# Altium PCB lab2_denikin_buck.PcbDoc
Units mm, origin at the board's own origin, x right, y up, seen from the top; angles counter-clockwise.
Board outline 60 x 30 mm, 2 copper layers (Top Layer, Bottom Layer), stack 1.536 mm thick; 26 components, 18 nets, 90 pads, 648 vias.
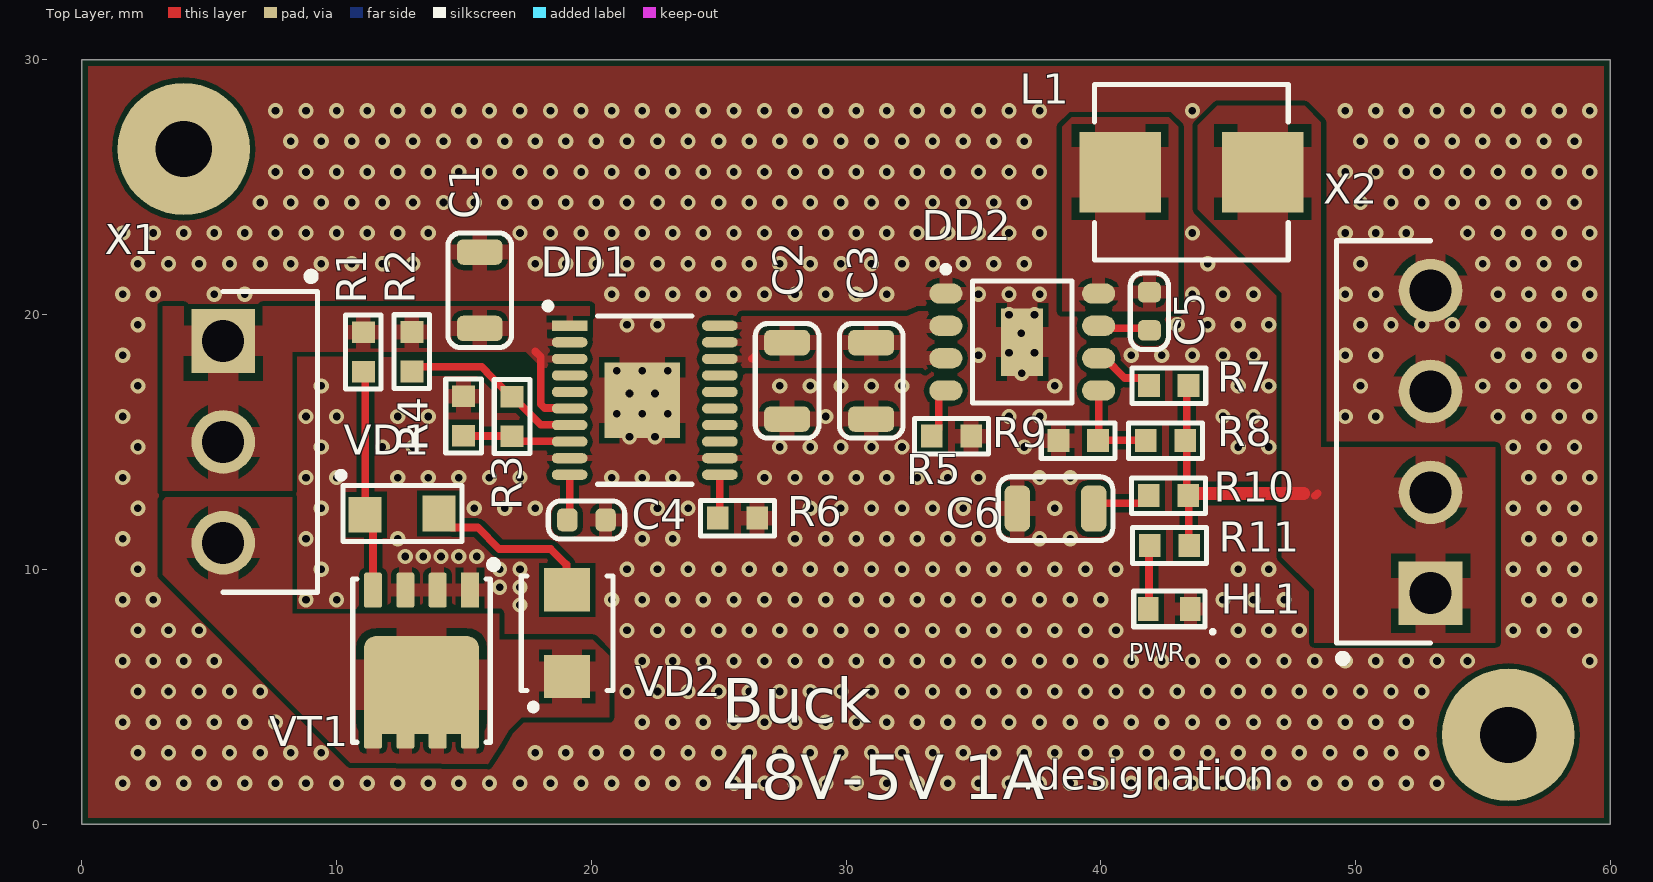
[diagram p0: Top Layer view]
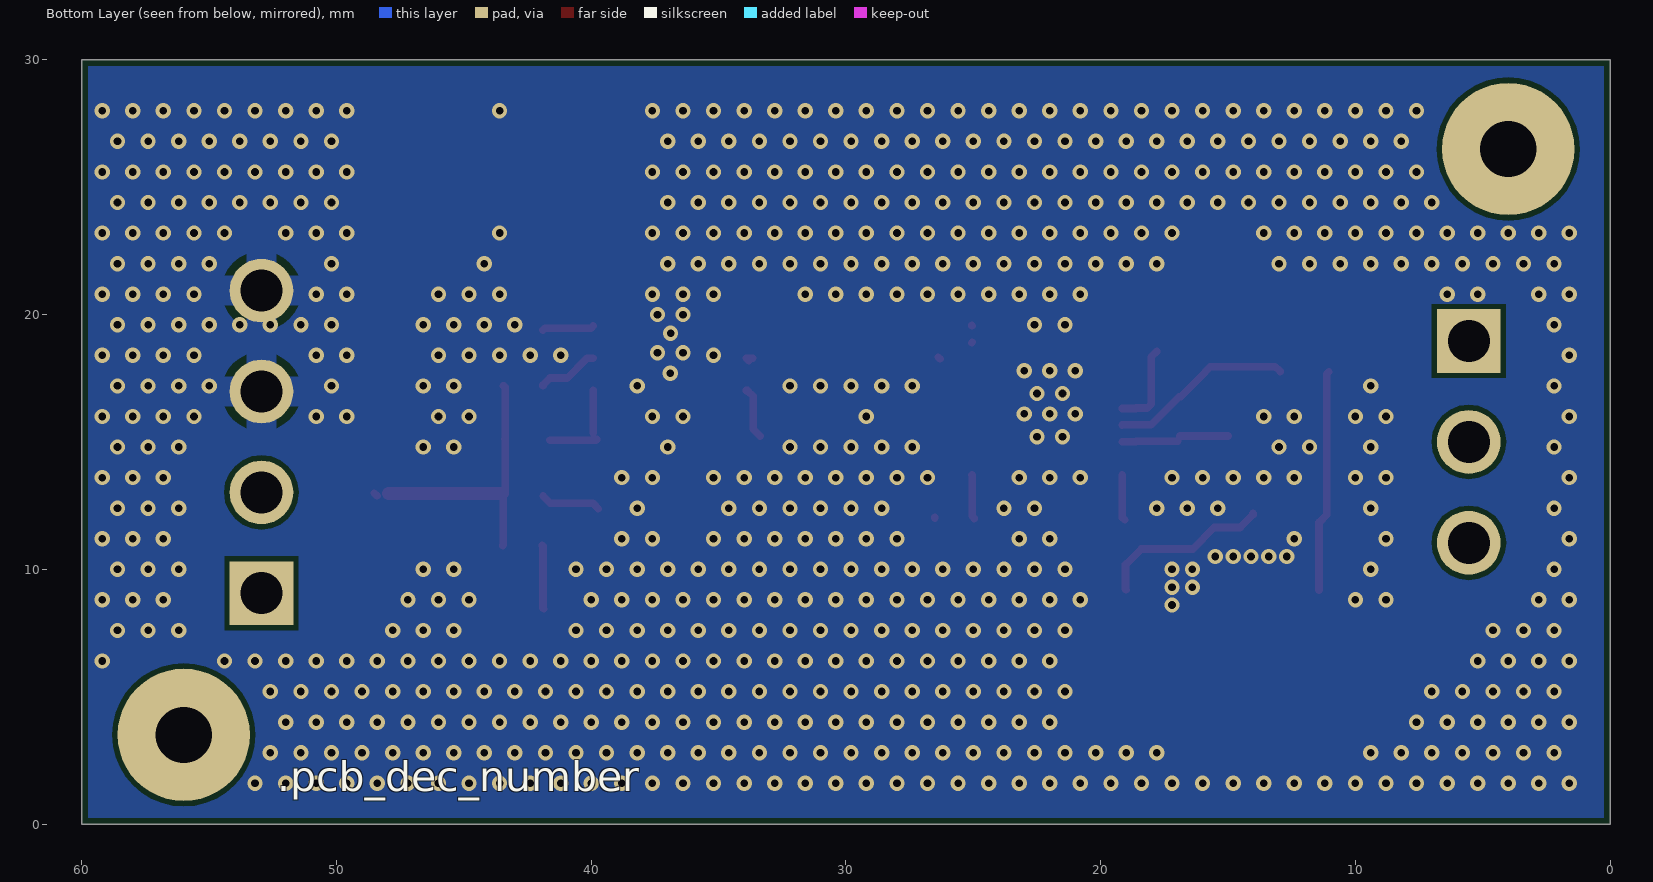
[diagram p1: Bottom Layer view, seen from below]
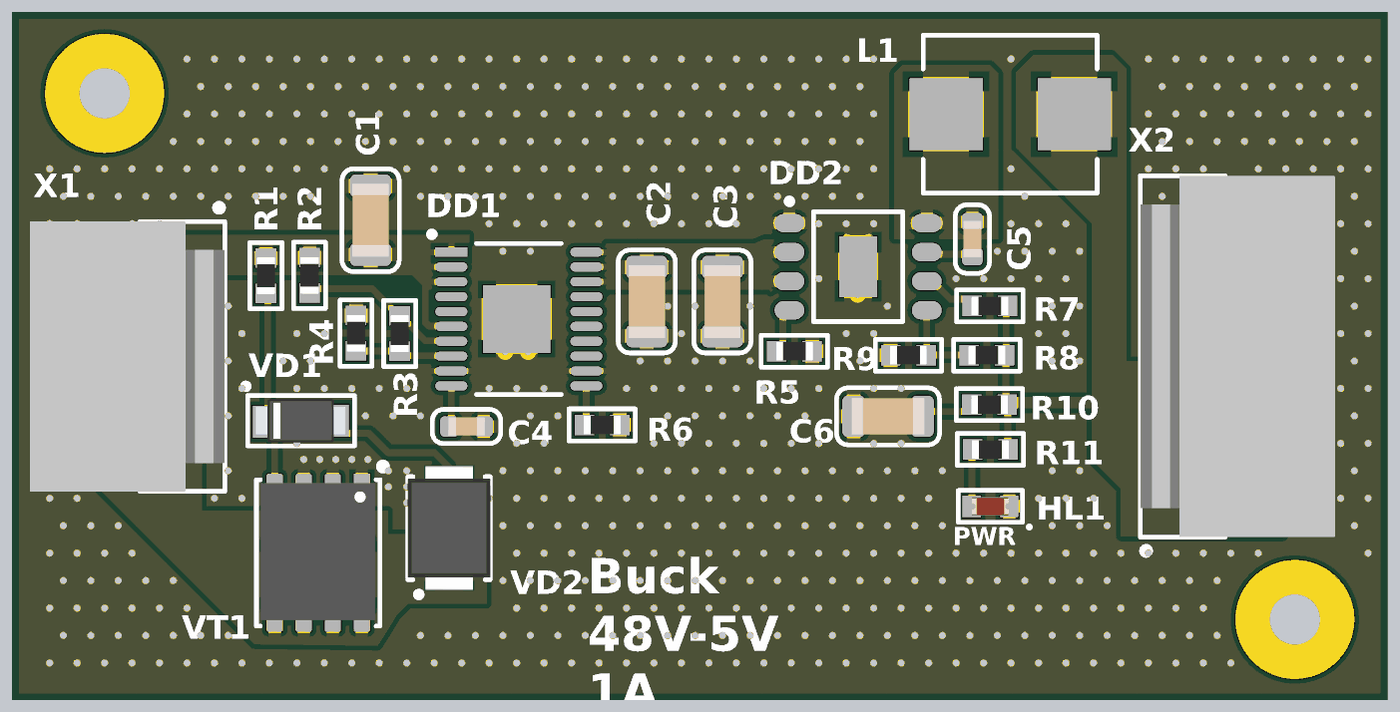
[diagram p2: 3D render of the assembled board from above, using the file's embedded part models]

## Layer stack, top to bottom
Top Solder: solder mask 0.0102, Solder Resist, Dk 3.5
Top Layer: signal copper 0.018
Core 1: core 1.5, FR4, Dk 4.6
Bottom Layer: signal copper 0.018
Bottom Solder: solder mask 0.0102, Solder Resist, Dk 3.5

## Board outline
0,0 60,0 60,30 0,30

## Design rules (kind name [scope] priority, off if disabled: settings)
AcuteAngle min_acute_angle [OnCopper] p1: minimum=3.50000000000000E+0001 checktracksonly=FALSE // Минимальный угол между примитивами топологии
BoardOutlineClearance board_outline_clearance_std [NOT (OnLayer('Bottom Overlay') OR OnLayer('Top Overlay'))] p1: gap=0.25 ignorepadtopadclearanceinfootprint=FALSE except(0: Arc-SplitContinuation Track-SplitContinuation SMDPad-SplitContinuation THPad-SplitContinuation Via-SplitContinuation Fill-SplitContinuation Poly-SplitContinuation Region-SplitContinuation Text-SplitContinuation) // Отступ элементов топологии от края фрезеруемой печатной платы
Clearance clearance_outer_18um_std [OnTopLayer OR OnBottomLayer] p1: gap=0.125 ignorepadtopadclearanceinfootprint=TRUE except(0.2: Arc-Fill Arc-Poly Track-Fill Track-Poly SMDPad-SMDPad SMDPad-Fill SMDPad-Poly THPad-Fill THPad-Poly Via-Fill Via-Poly Fill-Fill Fill-Poly Poly-Poly Poly-Region Poly-Text; 0.25: Arc-Hole Track-Hole SMDPad-Hole THPad-Hole Via-Hole Fill-Hole Poly-Hole Region-Hole Text-Hole) // Зазоры на внешних слоях
Clearance clearance_inner_18um_std [NOT (OnTopLayer Or OnBottomLayer)] p2: gap=0.125 ignorepadtopadclearanceinfootprint=FALSE except(0.2: Arc-Fill Arc-Poly Track-Fill Track-Poly SMDPad-SMDPad SMDPad-Fill SMDPad-Poly THPad-Fill THPad-Poly Via-Fill Via-Poly Fill-Fill Fill-Poly Poly-Poly Poly-Region Poly-Text; 0.25: Arc-Hole Track-Hole SMDPad-Hole THPad-Hole Via-Hole Fill-Hole Poly-Hole Region-Hole Text-Hole) // Зазоры на внутренних слоях
ComponentClearance [All] p1: gap=0 collisioncheckmode=3 verticalgap=0 showdistances=FALSE
DiffPairsRouting diff_pairs_routing [All] p1: maxlimit=0.127 minlimit=0.127 mostfreqgap=0.127 toplayer_minwidth=0.143 toplayer_maxwidth=0.143 toplayer_prefwidth=0.143 bottomlayer_minwidth=0.143 bottomlayer_maxwidth=0.143 bottomlayer_prefwidth=0.143 impedanceprofiledriven=TRUE impedanceprofileid={FD46899E-B5A2-4EF5-A302-5D2DB6A51F35} maxuncoupledlength=12.7 // Правила трассировки дифференциальных пар
HoleSize min_hole_size_std [IsPad] p1: absolutevalues=TRUE maxlimit=5.9 minlimit=0.6 maxpercent=80.000 minpercent=20.000 // Диаметр межслойного переходного отверстия
HoleSize min_hole_size_via_std [IsVia] p2: absolutevalues=TRUE maxlimit=5.9 minlimit=0.3 maxpercent=80.000 minpercent=20.000 // Минимальный диаметр монтажного отверстия
HoleToHoleClearance hole_to_hole_clearance_std [All] p1: gap=0.2 allowstackedmicrovias=FALSE // Минимальное расстояние между краями двух отверстий
MinimumAnnularRing min_via_ar_std [All] p1: minimumring=0.15 // Поясок площадки переходного отверстия (Annular ring VIA)
MinimumAnnularRing min_pad_ar_std [All] p2: minimumring=0.2 // Поясок монтажной контактной площадки (Annular ring PAD)
MinimumSolderMaskSliver min_solder_mask_bridge_std [All] p1: minsoldermaskwidth=0.15 // Мнимальная ширина масочного мостика
PlaneClearance plane_clearance_18um_std [All] p1: clearance=0.2 // Отступ полигона (для слоя plane) от элементов топологии
PlaneConnect [All] p1: planeconnectstyle=Relief reliefexpansion=0.5 reliefentries=4 reliefconductorwidth=0.2 reliefairgap=0.2
PolygonConnect poly_connect_to_pad<=0.3 [(AsMM(PadXSize_AllLayers)<=0.301) or (AsMM(PadYSize_AllLayers)<=0.301)] p1: thpad.connectstyle=Relief thpad.reliefconductorwidth=0.2 thpad.reliefentries=4 thpad.polygonreliefangle="90 Angle" thpad.airgapwidth=0.2 smdpad.connectstyle=Relief smdpad.reliefconductorwidth=0.2 smdpad.reliefentries=4 smdpad.polygonreliefangle="90 Angle" smdpad.airgapwidth=0.2 via.connectstyle=Direct via.reliefconductorwidth=0.254 via.reliefentries=4 via.polygonreliefangle="90 Angle" via.airgapwidth=0.254 // Правила подключения полигонов для падов от 0,3мм и меньше
PolygonConnect poly_connect_to_pad<=0.4 [(AsMM(PadXSize_AllLayers)<=0.401) or (AsMM(PadYSize_AllLayers)<=0.401)] p2: thpad.connectstyle=Relief thpad.reliefconductorwidth=0.26 thpad.reliefentries=4 thpad.polygonreliefangle="90 Angle" thpad.airgapwidth=0.2 smdpad.connectstyle=Relief smdpad.reliefconductorwidth=0.26 smdpad.reliefentries=4 smdpad.polygonreliefangle="90 Angle" smdpad.airgapwidth=0.2 via.connectstyle=Direct via.reliefconductorwidth=0.254 via.reliefentries=4 via.polygonreliefangle="90 Angle" via.airgapwidth=0.254 // Правила подключения полигонов для падов от 0,4 и меньше
PolygonConnect poly_connect_to_pad<=0.6 [(AsMM(PadXSize_AllLayers)<=0.601) or (AsMM(PadYSize_AllLayers)<=0.601)] p3: thpad.connectstyle=Relief thpad.reliefconductorwidth=0.33 thpad.reliefentries=4 thpad.polygonreliefangle="90 Angle" thpad.airgapwidth=0.2 smdpad.connectstyle=Relief smdpad.reliefconductorwidth=0.33 smdpad.reliefentries=4 smdpad.polygonreliefangle="90 Angle" smdpad.airgapwidth=0.2 via.connectstyle=Direct via.reliefconductorwidth=0.254 via.reliefentries=4 via.polygonreliefangle="90 Angle" via.airgapwidth=0.254 // Правила подключения полигонов для падов от 0,6мм и меньше
PolygonConnect poly_connect_to_pad<=0.7 [(AsMM(PadXSize_AllLayers)<=0.701) or (AsMM(PadYSize_AllLayers)<=0.701)] p4: thpad.connectstyle=Relief thpad.reliefconductorwidth=0.46 thpad.reliefentries=4 thpad.polygonreliefangle="90 Angle" thpad.airgapwidth=0.2 smdpad.connectstyle=Relief smdpad.reliefconductorwidth=0.46 smdpad.reliefentries=4 smdpad.polygonreliefangle="90 Angle" smdpad.airgapwidth=0.2 via.connectstyle=Direct via.reliefconductorwidth=0.254 via.reliefentries=4 via.polygonreliefangle="90 Angle" via.airgapwidth=0.254 // Правила подключения полигонов для падов от 0,7мм и меньше
PolygonConnect poly_connect_to_pad<=0.8 [(AsMM(PadXSize_AllLayers)<=0.8)or(AsMM(PadYSize_AllLayers)<=0.8)] p5: thpad.connectstyle=Relief thpad.reliefconductorwidth=0.53 thpad.reliefentries=4 thpad.polygonreliefangle="90 Angle" thpad.airgapwidth=0.3 smdpad.connectstyle=Relief smdpad.reliefconductorwidth=0.53 smdpad.reliefentries=4 smdpad.polygonreliefangle="90 Angle" smdpad.airgapwidth=0.2 via.connectstyle=Direct via.reliefconductorwidth=0.254 via.reliefentries=4 via.polygonreliefangle="90 Angle" via.airgapwidth=0.254 // Правила подключения полигонов для падов от 0,8мм и меньше
PolygonConnect poly_connect_to_pad<=1 [(AsMM(PadXSize_AllLayers)<=1.01)or(AsMM(PadYSize_AllLayers)<=1.01)] p6: thpad.connectstyle=Relief thpad.reliefconductorwidth=0.6 thpad.reliefentries=4 thpad.polygonreliefangle="90 Angle" thpad.airgapwidth=0.3 smdpad.connectstyle=Relief smdpad.reliefconductorwidth=0.6 smdpad.reliefentries=4 smdpad.polygonreliefangle="90 Angle" smdpad.airgapwidth=0.2 via.connectstyle=Direct via.reliefconductorwidth=0.254 via.reliefentries=4 via.polygonreliefangle="90 Angle" via.airgapwidth=0.254 // Правила подключения полигонов для падов от 1мм и меньше
PolygonConnect poly_connect_to_pad<=1.3 [(AsMM(PadXSize_AllLayers)<=1.31)or(AsMM(PadYSize_AllLayers)<=1.31)] p7: thpad.connectstyle=Relief thpad.reliefconductorwidth=0.66 thpad.reliefentries=4 thpad.polygonreliefangle="90 Angle" thpad.airgapwidth=0.3 smdpad.connectstyle=Relief smdpad.reliefconductorwidth=0.86 smdpad.reliefentries=4 smdpad.polygonreliefangle="90 Angle" smdpad.airgapwidth=0.2 via.connectstyle=Direct via.reliefconductorwidth=0.254 via.reliefentries=4 via.polygonreliefangle="90 Angle" via.airgapwidth=0.254 // Правила подключения полигонов для падов от 1,3мм и меньше
PolygonConnect poly_connect_to_pad<=1.6 [(AsMM(PadXSize_AllLayers)<=1.61)or(AsMM(PadYSize_AllLayers)<=1.61)] p8: thpad.connectstyle=Relief thpad.reliefconductorwidth=0.8 thpad.reliefentries=4 thpad.polygonreliefangle="90 Angle" thpad.airgapwidth=0.3 smdpad.connectstyle=Relief smdpad.reliefconductorwidth=1 smdpad.reliefentries=4 smdpad.polygonreliefangle="90 Angle" smdpad.airgapwidth=0.2 via.connectstyle=Direct via.reliefconductorwidth=0.254 via.reliefentries=4 via.polygonreliefangle="90 Angle" via.airgapwidth=0.254 // Правила подключения полигонов для падов от 1,6мм и меньше
PolygonConnect poly_connect_to_pad<=1.8 [(AsMM(PadXSize_AllLayers)<=1.8)or(AsMM(PadYSize_AllLayers)<=1.8)] p9: thpad.connectstyle=Relief thpad.reliefconductorwidth=1 thpad.reliefentries=4 thpad.polygonreliefangle="90 Angle" thpad.airgapwidth=0.3 smdpad.connectstyle=Relief smdpad.reliefconductorwidth=1.2 smdpad.reliefentries=4 smdpad.polygonreliefangle="90 Angle" smdpad.airgapwidth=0.2 via.connectstyle=Direct via.reliefconductorwidth=0.254 via.reliefentries=4 via.polygonreliefangle="90 Angle" via.airgapwidth=0.254 // Правила подключения полигонов для падов от 1,8мм и меньше
PolygonConnect poly_connect_to_pad<=2 [(AsMM(PadXSize_AllLayers)<=2.01)or(AsMM(PadYSize_AllLayers)<=2.01)] p10: thpad.connectstyle=Relief thpad.reliefconductorwidth=1.1 thpad.reliefentries=4 thpad.polygonreliefangle="90 Angle" thpad.airgapwidth=0.3 smdpad.connectstyle=Relief smdpad.reliefconductorwidth=1.4 smdpad.reliefentries=4 smdpad.polygonreliefangle="90 Angle" smdpad.airgapwidth=0.2 via.connectstyle=Direct via.reliefconductorwidth=0.254 via.reliefentries=4 via.polygonreliefangle="90 Angle" via.airgapwidth=0.254 // Правила подключения полигонов для падов от 2мм и меньше
PolygonConnect poly_connect_to_pad<=2.3 [(AsMM(PadXSize_AllLayers)<=2.31)or(AsMM(PadYSize_AllLayers)<=2.31)] p11: thpad.connectstyle=Relief thpad.reliefconductorwidth=1.2 thpad.reliefentries=4 thpad.polygonreliefangle="90 Angle" thpad.airgapwidth=0.3 smdpad.connectstyle=Relief smdpad.reliefconductorwidth=1.4 smdpad.reliefentries=4 smdpad.polygonreliefangle="90 Angle" smdpad.airgapwidth=0.2 via.connectstyle=Direct via.reliefconductorwidth=0.254 via.reliefentries=4 via.polygonreliefangle="90 Angle" via.airgapwidth=0.254 // Правила подключения полигонов для падов от 2,3мм и меньше
PolygonConnect poly_connect_to_pad<=2.5 [(AsMM(PadXSize_AllLayers)<=2.51)or(AsMM(PadYSize_AllLayers)<=2.51)] p12: thpad.connectstyle=Relief thpad.reliefconductorwidth=1.2 thpad.reliefentries=4 thpad.polygonreliefangle="90 Angle" thpad.airgapwidth=0.3 smdpad.connectstyle=Relief smdpad.reliefconductorwidth=1.4 smdpad.reliefentries=4 smdpad.polygonreliefangle="90 Angle" smdpad.airgapwidth=0.2 via.connectstyle=Direct via.reliefconductorwidth=0.254 via.reliefentries=4 via.polygonreliefangle="90 Angle" via.airgapwidth=0.254 // Правила подключения полигонов для падов от 2,5мм и меньше
PolygonConnect poly_connect_to_pad<=2.7 [(AsMM(PadXSize_AllLayers)<=2.71)or(AsMM(PadYSize_AllLayers)<=2.71)] p13: thpad.connectstyle=Relief thpad.reliefconductorwidth=1.4 thpad.reliefentries=4 thpad.polygonreliefangle="90 Angle" thpad.airgapwidth=0.3 smdpad.connectstyle=Relief smdpad.reliefconductorwidth=1.6 smdpad.reliefentries=4 smdpad.polygonreliefangle="90 Angle" smdpad.airgapwidth=0.2 via.connectstyle=Direct via.reliefconductorwidth=0.254 via.reliefentries=4 via.polygonreliefangle="90 Angle" via.airgapwidth=0.254 // Правила подключения полигонов для падов от 2,7мм и меньше
PolygonConnect poly_connect_to_pad<=3 [(AsMM(PadXSize_AllLayers)<=3.01)or(AsMM(PadYSize_AllLayers)<=3.01)] p14: thpad.connectstyle=Relief thpad.reliefconductorwidth=1.6 thpad.reliefentries=4 thpad.polygonreliefangle="90 Angle" thpad.airgapwidth=0.3 smdpad.connectstyle=Relief smdpad.reliefconductorwidth=1.8 smdpad.reliefentries=4 smdpad.polygonreliefangle="90 Angle" smdpad.airgapwidth=0.2 via.connectstyle=Direct via.reliefconductorwidth=0.254 via.reliefentries=4 via.polygonreliefangle="90 Angle" via.airgapwidth=0.254 // Правила подключения полигонов для падов от 3мм и меньше
PolygonConnect poly_connect_to_pad<=7 [(AsMM(PadXSize_AllLayers)<7.01)or(AsMM(PadYSize_AllLayers)<=7.01)] p15: thpad.connectstyle=Relief thpad.reliefconductorwidth=2 thpad.reliefentries=4 thpad.polygonreliefangle="90 Angle" thpad.airgapwidth=0.4 smdpad.connectstyle=Relief smdpad.reliefconductorwidth=2 smdpad.reliefentries=4 smdpad.polygonreliefangle="90 Angle" smdpad.airgapwidth=0.3 via.connectstyle=Direct via.reliefconductorwidth=0.254 via.reliefentries=4 via.polygonreliefangle="90 Angle" via.airgapwidth=0.254 // Правила подключения полигонов для падов от 7мм и меньше
PolygonConnect poly_connect_to_pad [All] p16: thpad.connectstyle=Relief thpad.reliefconductorwidth=0.25 thpad.reliefentries=4 thpad.polygonreliefangle="90 Angle" thpad.airgapwidth=0.2 smdpad.connectstyle=Relief smdpad.reliefconductorwidth=0.25 smdpad.reliefentries=4 smdpad.polygonreliefangle="90 Angle" smdpad.airgapwidth=0.2 via.connectstyle=Direct via.reliefconductorwidth=0.25 via.reliefentries=4 via.polygonreliefangle="90 Angle" via.airgapwidth=0.2 // Правила подключения полигонов общие
RoutingCorners [All] p1 off: cornerstyle=45-Degree minsetback=2.5 maxsetback=2.5
RoutingVias [All] p1: holewidth=0.3 width=0.6 viastyle="Through Hole" minholewidth=0.3 minwidth=0.6 maxholewidth=5.9 maxwidth=6.4
SilkToSilkClearance silk_to_silk_clearance_std [All] p1 off: silktosilkclearance=0.15 // Отступ текста шелкографии от других примитивов шелкографии
SilkToSolderMaskClearance silk_to_solder_mask_clearance_std [IsPad] p1 off: minsilkscreentomaskgap=0.15 clearancetoexposedcopper=FALSE // Минимальное расстояние между элементами шелкографии и вскрытой медью
SolderMaskExpansion solder_mask_expansion_std [All] p1: expansion=0.05 // Припуск паяльной масски
UnRoutedNet [All] p1: checkbadconnections=TRUE
Width width_18um_std [All] p1: maxlimit=10 minlimit=0.125 preferedwidth=0.15 checkconnectedcopper=TRUE // Ширина проводников (общая)
19 further rules are at their usual default settings.

## Classes and differential pairs
component class lab2_demcheva_buck: C1 C2 C3 C4 C5 C6 DD1 DD2 HL1 L1 R1 R2 R3 R4 R7 R8 R9 VD1 VD2 VT1 X1 X2

## Components (designator, comment, footprint, x,y, rotation, side; value= is the part's Value field where it differs from the comment)
C1 "2,2 мк" C1206 15.621,20.955 r270 top
C2 "2,2 мк" C1206 27.686,17.399 r90 top
C3 "2,2 мк" C1206 30.988,17.399 r90 top
C4 "680" C0603 19.812,11.938 r180 top
C5 "2200" C0603 41.91,20.129 r90 top
C6 "10 мк" C1206 38.226,12.382 r0 top
DD1 "TPS16630PWPR" HTSSOP-20 22.098,16.637 r0 top
DD2 "LM5164-Q1" SO-8-POWERPAD 36.918,18.923 r0 top
HL1 "TLMG1100-GS08" HL0603 42.697,8.445 r180 top
L1 "SRP7028A-220M" SRP-2-670X660X280 43.561,25.59 r0 top
R1 "1,2 к" R0603 11.049,18.529 r270 top
R2 "820 к" R0603 12.954,18.542 r270 top
R3 "4,99 к" R0603 16.891,16.002 r270 top
R4 "20,5 к" R0603 14.986,16.015 r270 top
R5 "24 к" R0603 34.138,15.227 r0 top
R6 "18 к" R0603 25.736,12.007 r0 top
R7 "10 к" R0603 42.672,17.208 r180 top
R8 "560 к" R0603 42.545,15.049 r180 top
R9 "180 к" R0603 39.116,15.049 r180 top
R10 "1" R0603 42.66,12.89 r180 top
R11 "100" R0603 42.697,10.934 r180 top
VD1 "BZD17C18P" DO-219AB 12.573,12.192 r0 top
VD2 "SS36-E3/57T" DO-214AB 19.05,7.493 r90 top
VT1 "CSD19532Q5B" SON-8 13.335,6.411 r180 top
X1 "1-1123723-3" 1-1123723-3 5,15 r270 top
X2 "1-1123723-4" 1-1123723-4 53.5,15 r90 top

## Footprints (in the part's own frame and the unit in brackets; to place one, negate y for a bottom-side part, rotate by r counter-clockwise, add the part's x,y. Pads: shape width x height; smd on the part's side, far side on the other; paste and mask are expansions set on the pad)
1-1123723-3 [mm]
  rect 2.5x2.5 hole 1.65: 1(-3.96,0.55)
  round 2.5 hole 1.65: 2(0,0.55) 3(3.96,0.55)
  silkscreen extent -6.65,0.55 5.9,4.25, body extent -5.91,-4.25 5.91,4.25, height 10.7
1-1123723-4 [mm]
  rect 2.5x2.5 hole 1.65: 1(-5.94,0.55)
  round 2.5 hole 1.65: 2(-1.98,0.55) 3(1.98,0.55) 4(5.94,0.55)
  silkscreen extent -8.65,0.55 7.9,4.25, body extent -7.89,-4.25 7.89,4.25, height 10.7
C0603 [mm] "Chip Capacitor, 2-Leads, Body 1,60x0,80mm, IPC Medium Density"
  rrect50% 0.8x0.9 smd: 1(-0.75,0) 2(0.75,0)
  silkscreen extent -1.5,-0.75 1.5,0.75, body extent -0.8,-0.4 0.8,0.4, height 0.8
C1206 [mm] "Chip Capacitor, 2-Leads, Body 3,20x1,60mm, IPC Medium Density"
  rrect50% 1x1.8 smd: 1(-1.5,0) 2(1.5,0)
  silkscreen extent -2.25,-1.25 2.25,1.25, body extent -1.6,-0.8 1.6,0.8, height 0.78
DO-214AB [mm] "Molded Diode, 2-Leads, Body 6,86x5,91mm, IPC Medium Density"
  rect 1.7x1.8 smd: 1(-1.7,0) 2(1.7,0)
  silkscreen extent -3.02,-1.8 2.25,1.8, body extent -2.7,-1.81 2.7,1.81, height 2.43
DO-219AB [mm]
  rect 1.3x1.4 smd: 1(-1.45,-0.05) 2(1.45,0)
  silkscreen extent -2.45,-1.1 2.35,1.55, body extent -1.95,-0.95 1.95,0.95, height 1.25
HL0603 [mm] "Chip Diode, 2-Leads, Body 1,60x0,80mm, IPC Medium Density"
  rect 0.8x0.95 smd: 1(-0.825,0) 2(0.825,0)
  silkscreen extent -1.75,-0.7 1.4,0.95, body extent -0.81,-0.4 0.81,0.4, height 0.6
HTSSOP-20 [mm] "TSOP, 20-Leads, Body 6,50x4,40mm, Pitch 0,65mm, Thermal Pad 2,96x2,96mm, IPC Medium Density"
  rect 2.96x2.96 smd: 0(-0.098,0)
  rect 1.4x0.4 smd: 1(-2.95,2.925)
  oval 1.4x0.4 smd: 2(-2.95,2.275) 3(-2.95,1.625) 4(-2.95,0.975) 5(-2.95,0.325) 6(-2.95,-0.325) 7(-2.95,-0.975) 8(-2.95,-1.625) 9(-2.95,-2.275) 10(-2.95,-2.925) 11(2.95,-2.925) 12(2.95,-2.275) 13(2.95,-1.625) 14(2.95,-0.975) 15(2.95,-0.325) 16(2.95,0.325) 17(2.95,0.975) 18(2.95,1.625) 19(2.95,2.275) 20(2.95,2.925)
  silkscreen extent -3.92,-3.3 1.85,3.82, body extent -2.25,-3.3 2.25,3.3, height 1.2
R0603 [mm] "Chip Resistor, 2-Leads, Body 1,60x0,80mm, IPC Medium Density"
  rect 0.85x0.9 smd: 1(-0.775,0) 2(0.775,0)
  silkscreen extent -1.45,-0.7 1.45,0.7, body extent -0.8,-0.4 0.8,0.4, height 0.45
SO-8-POWERPAD [mm] "SOP, 8-Leads, Body 4,90x3,90mm, Pitch 1,27mm, Thermal Pad 2,65x1,65mm, IPC Medium Density"
  rect 1.65x2.65 smd: 0(0,0)
  oval 1.3x0.8 smd: 1(-3,1.905) 2(-3,0.635) 3(-3,-0.635) 4(-3,-1.905) 5(3,-1.905) 6(3,-0.635) 7(3,0.635) 8(3,1.905)
  silkscreen extent -3.12,-2.4 1.95,2.98, body extent -1.9,-2.4 1.9,2.4, height 1.7
SON-8 [mm]
  rrect25% 0.71x1.372 smd paste-10: D(-1.905,2.77) D(-0.635,2.77) D(0.635,2.77) D(1.905,2.77)
  rrect25% 4.52x3.85 smd paste-10: D(0,0.95)
  rrect25% 0.71x1.372 smd paste-0.002: G(1.905,-2.77) S(-0.635,-2.77) S(0.635,-2.77)
  rect 0.71x1.372 smd paste-0.002: S(-1.905,-2.77)
  silkscreen extent -2.83,-3.78 2.7,3.2, body extent -2.48,-3.05 2.52,2.95, height 1.05
SRP-2-670X660X280 [mm] "Precision Wire Wound Inductor, 2-Leads, Body 7,30x6,60mm, IPC Medium Density"
  rect 3.2x3.15 smd: 1(-2.8,0) 2(2.8,0)
  silkscreen extent -3.8,-3.45 3.8,3.45, body extent -3.8,-3.45 3.8,3.45, height 3

## Part data
C1: library part c0077, "=Описание", HelpURL=https://www.yageo.com/upload/media/product/productsearch/datasheet/mlcc/UPY-NP0X7R_MV_100-to-630V_22.pdf, ID=c0077, Корпус=1206, Наименование=CC1206KKX7R0BB225, Напряжение="100 В", Номинал="2,2 мк", Номинальное напряжение="100 В", Описание="Конденсатор чип 1206 2,2 мкФ 100 В ±10 %", Отклонение="±10 %", Производитель="YAGEO Corp.", Рабочие температуры="от –55 °С до +125 °С", Температурный коэффициент емкости=X7R, Фамилия=Ларионов
C2 C3: library part c0076, "=Описание", HelpURL=https://www.yageo.com/upload/media/product/productsearch/datasheet/mlcc/UPY-NP0X7R_MV_100-to-630V_22.pdf, ID=c0076, Корпус=1206, Наименование=CC1206KKX7R0BB225, Напряжение="100 В", Номинал="2,2 мк", Номинальное напряжение="100 В", Описание="Конденсатор чип 1206 2,2 мкФ 100 В ±10 %", Отклонение="±10 %", Производитель="YAGEO Corp.", Рабочие температуры="от –55 °С до +125 °С", Температурный коэффициент емкости=X7R, Фамилия=Ларионов
C4: library part c0005, "=Описание", HelpURL=https://www.yageo.com/upload/media/product/productsearch/datasheet/mlcc/UPY-GPHC_X7R_6.3V-to-50V_20.pdf, ID=c0005, Корпус=0603, Наименование=CC0603JRX7R9BB681, Напряжение="50 В", Номинал=680, Номинальное напряжение="50 В", Описание="Конденсатор чип 0603 680 пФ 50 В ±5 %", Отклонение="±5 %", Производитель="YAGEO Corp.", Рабочие температуры="от –55 °С до +125 °С", Температурный коэффициент емкости=X7R, Фамилия=Демчева
C5: library part c0019, "=Описание", HelpURL=https://www.yageo.com/upload/media/product/products/datasheet/mlcc/UPY-GPHC_X7R_6.3V-to-50V_20.pdf, ID=c0019, Корпус=0603, Наименование=CC0603KRX7R9BB222, Напряжение="50 В", Номинал=2200, Номинальное напряжение="50 В", Описание="Конденсатор чип 0603 2,2 нФ 50 В ±10 %", Отклонение="±10 %", Производитель="YAGEO Corp.", Рабочие температуры="от –55 °С до +125 °С", Температурный коэффициент емкости=X7R, Фамилия=Паньков
C6: library part c0095, "=Описание", HelpURL=https://www.yageo.com/upload/media/product/productsearch/datasheet/mlcc/UPY-GPHC_X7R_6.3V-to-50V_20.pdf, ID=c0095, Корпус=1206, Наименование=CC1206KRX7R8BB106, Напряжение="25 В", Номинал="10 мк", Номинальное напряжение="25 В", Описание="Конденсатор чип 1206 10 мкФ 25 В ±10 %", Отклонение="±10 %", Производитель="YAGEO Corp.", Рабочие температуры="от –55 °С до +125 °С", Температурный коэффициент емкости=X7R, Фамилия=Паньков
DD1: library part dd0002, "=Описание", HelpURL=https://www.ti.com/product/TPS1663, ID=dd0002, Корпус=HTSSOP-20, Максимальное напряжение="67 В", Наименование=TPS16630PWPR, Напряжение="от 4,5 В до 60 В", Описание="Защитная микросхема eFuse 60 В и 6 А", Производитель="Texas Instruments", Рабочие температуры="от -40 °С до +125 °С", Ток="от 0,6 А до 6 А", Фамилия=Жернаков
DD2: library part dd0009, "=Описание", HelpURL=https://www.ti.com/product/LM5164-Q1, ID=dd0009, Входное напряжение="от 6,0 В до 100 В", Выходное напряжение="12 В", Коммутируемый ток="1 А", Корпус=SO-8-POWERPAD, Наименование=LM5164-Q1, Описание="Понижающий преобразователь напряжения 100 В и 1 А", Производитель="Texas Instruments", Рабочие температуры="от -40 °С до +125 °С", Фамилия=Демчева, Частота переключения="до 1 МГц"
HL1: library part hl0005, "=Описание", HelpURL=https://www.vishay.com/leds/list/product-83173/, ID=hl0005, Корпус=0603, Наименование=TLMG1100-GS08, Номинальная длина волны="570 нм", Номинальная сила света="35 мкд", Номинальное падение напряжения="2,1 В", Номинальный прямой ток="30 мА", Описание="Светодиод чип 0603 зеленый", Производитель="Vishay Intertechnology, Inc.", Рабочие температуры="от -40 °С до +100 °С", Рассеиваемая мощность="90 мВт", Фамилия=Ларионов, Цвет=Green
L1: library part l0005, "=Описание", HelpURL=https://www.bourns.com/products/magnetic-products/power-inductors-aec-q200-compliant/product/SRP7028A, ID=l0005, Индуктивность="22 мкГн", Корпус="6,7 x 6,6 x 2,8", Максимальное активное сопротивление="190 мОм", Наименование=SRP7028A-220M, Номинал="22 мкГн", Номинальное активное сопротивление="165 мОм", Номинальный ток (при нагреве на 20 °С/40 °С)="2 А", Описание="Катушка индуктивности 22 мкГн ±20 %", Отклонение="±20 %", Производитель="Bourns, Inc.", Рабочее напряжение="не указано", Рабочие температуры="от –55 °С до +150 °С", Резонансная частота="10 МГц", Ток насыщения="3,5 А", Фамилия=Ларионов
R1: library part r0034, "=Описание", HelpURL=https://www.yageo.com/upload/media/product/productsearch/datasheet/rchip/PYu-RC_Group_51_RoHS_L_11.pdf, ID=r0034, Корпус=0603, Наименование=RC0603FR-071K2L, Номинал="1,2 к", Номинальное напряжение="75 В", Номинальный ток="1 А", Описание="Резистор чип 0603 1,2 кОм ±1 % 0,1 Вт", Отклонение="±1 %", Производитель="YAGEO Corp.", Рабочие температуры="от –55 °С до +155 °С", Фамилия=Паньков
R2: library part r0124, "=Описание", HelpURL=https://www.yageo.com/upload/media/product/productsearch/datasheet/rchip/PYu-RC_Group_51_RoHS_L_11.pdf, ID=r0124, Корпус=0603, Наименование=RC0603FR-07820KL, Номинал="820 к", Номинальное напряжение="75 В", Номинальный ток="1 А", Описание="Резистор чип 0603 820 кОм ±1 % 0,1 Вт", Отклонение="±1 %", Примечание="Ряд E24", Производитель="YAGEO Corp.", Рабочие температуры="от –55 °С до +155 °С", Фамилия=Паньков
R3: library part r0050, "=Описание", HelpURL=https://www.yageo.com/upload/media/product/productsearch/datasheet/rchip/PYu-RC_Group_51_RoHS_L_11.pdf, ID=r0050, Корпус=0603, Наименование=RC0603FR-074K99L, Номинал="4,99 к", Номинальное напряжение="75 В", Номинальный ток="1 А", Описание="Резистор чип 0603 4,99 кОм ±1 % 0,1 Вт", Отклонение="±1 %", Производитель="YAGEO Corp.", Рабочие температуры="от –55 °С до +155 °С", Фамилия=Жернаков
R4: library part r0071, "=Описание", HelpURL=https://ru.mouser.com/ProductDetail/Yageo/RC0603FR-0720K5L/?qs=VU8sRB4EgwDkGE%252BE2CpPDg%3D%3D, ID=r0071, Корпус=0603, Наименование=RC0603FR-0720K5L, Номинал="20,5 к", Номинальное напряжение="75 В", Номинальный ток="1 А", Описание="Резистор чип 0603 20,5 кОм  ±1 % 0,1 Вт", Отклонение="±1 %", Производитель="YAGEO Corp.", Рабочие температуры="от –55 °С до +155 °С", Фамилия=Демчева
R5: library part r0072, "=Описание", HelpURL=https://www.yageo.com/upload/media/product/productsearch/datasheet/rchip/PYu-RC_Group_51_RoHS_L_11.pdf, ID=r0072, Корпус=0603, Наименование=RC0603FR-0724KL, Номинал="24 к", Номинальное напряжение="75 В", Номинальный ток="1 А", Описание="Резистор чип 0603 24 кОм ±1 % 0,1 Вт", Отклонение="±1 %", Производитель="YAGEO Corp.", Рабочие температуры="от –55 °С до +155 °С", Фамилия=Паньков
R6: library part r0068, "=Описание", HelpURL=https://www.yageo.com/upload/media/product/productsearch/datasheet/rchip/PYu-RC_Group_51_RoHS_L_11.pdf, ID=r0068, Корпус=0603, Наименование=RC0603FR-0718KL, Номинал="18 к", Номинальное напряжение="75 В", Номинальный ток="1 А", Описание="Резистор чип 0603 18 кОм ±1 % 0,1 Вт", Отклонение="±1 %", Примечание="Ряд E24", Производитель="YAGEO Corp.", Рабочие температуры="от –55 °С до +155 °С", Фамилия=Паньков
R7: library part r0060, "=Описание", HelpURL=https://www.yageo.com/upload/media/product/productsearch/datasheet/rchip/PYu-RC_Group_51_RoHS_L_11.pdf, ID=r0060, Корпус=0603, Наименование=RC0603FR-0710KL, Номинал="10 к", Номинальное напряжение="75 В", Номинальный ток="1 А", Описание="Резистор чип 0603 10 кОм ±1 % 0,1 Вт", Отклонение="±1 %", Примечание="Ряд E24", Производитель="YAGEO Corp.", Рабочие температуры="от –55 °С до +155 °С", Фамилия=Самарин
R8: library part r0120, "=Описание", HelpURL=https://www.yageo.com/upload/media/product/productsearch/datasheet/rchip/PYu-RC_Group_51_RoHS_L_11.pdf, ID=r0120, Корпус=0603, Наименование=RC0603FR-07560KL, Номинал="560 к", Номинальное напряжение="75 В", Номинальный ток="1 А", Описание="Резистор чип 0603 560 кОм ±1 % 0,1 Вт", Отклонение="±1 %", Производитель="YAGEO Corp.", Рабочие температуры="от –55 °С до +155 °С", Фамилия=Паньков
R9: library part r0105, "=Описание", HelpURL=https://www.yageo.com/upload/media/product/productsearch/datasheet/rchip/PYu-RC_Group_51_RoHS_L_11.pdf, ID=r0105, Корпус=0603, Наименование=RC0603FR-07180KL, Номинал="180 к", Номинальное напряжение="75 В", Номинальный ток="1 А", Описание="Резистор чип 0603 180 кОм ±1 % 0,1 Вт", Отклонение="±1 %", Производитель="YAGEO Corp.", Рабочие температуры="от –55 °С до +155 °С", Фамилия=Паньков
R10: library part r0002, "=Описание", HelpURL=https://www.yageo.com/upload/media/product/productsearch/datasheet/rchip/PYu-RC_Group_51_RoHS_L_11.pdf, ID=r0002, Корпус=0603, Наименование=RC0603FR-071RL, Номинал=1, Номинальное напряжение="75 В", Номинальный ток="1 А", Описание="Резистор чип 0603 1 Ом ±1 % 0,1 Вт", Отклонение="±1 %", Производитель="YAGEO Corp.", Рабочие температуры="от –55 °С до +155 °С", Фамилия=Ларионов
R11: library part r0007, "=Описание", HelpURL=https://www.yageo.com/upload/media/product/productsearch/datasheet/rchip/PYu-RC_Group_51_RoHS_L_11.pdf, ID=r0007, Корпус=0603, Наименование=RC0603FR??07100RL, Номинал=100, Номинальное напряжение="75 В", Номинальный ток="1 А", Описание="Резистор чип 0603 100 Ом ±1 % 0,1 Вт", Отклонение="±1 %", Примечание="Ряд E24", Производитель="YAGEO Corp.", Рабочие температуры="от –55 °С до +155 °С", Фамилия=Самарин
VD1: library part vd0018, "=Описание", HelpURL=https://www.vishay.com/product?docid=85161, ID=vd0018, Корпус=DO-219AB, Наименование=BZD17C18P, Номинальное напряжение стабилизации="18 В", Номинальный ток стабилизации="25 мА", Описание="Стабилитрон 18 В", Производитель="Vishay Intertechnology, Inc.", Рабочие температуры="от –55 °С до +150 °С", Разброс напряжения стабилизации="16,8...19,1 В", Фамилия=Паньков
VD2: library part vd0004, "=Описание", HelpURL=https://www.vishay.com/product?docid=88751, ID=vd0004, Импульсное обратное напряжение="60 В", Корпус=DO-214AB, Макс допустимый средний прямой ток="3 А", Наименование=SS36-E3/57T, Описание="Диод Шоттки 60 В 3 А", Пиковое прямое напряжение="0,75 В", Производитель="Vishay Intertechnology, Inc.", Рабочие температуры="от –55 °С до +150 °С", Фамилия=Жернаков
VT1: library part vt0001, "=Описание", HelpURL=https://www.ti.com/product/CSD19532Q5B, ID=vt0001, Корпус=SON-8, Наименование=CSD19532Q5B, Напряжение затвор — исток="±20 В", Напряжение сток — исток="100 В", Описание="Транзистор полевой N-канальный 100 В 17 А", Производитель="Texas Instruments", Рабочие температуры="от –55 °С до +150 °С", Сопротивление сток — исток="0,0057 Ом", Ток стока="17 А", Фамилия=Жернаков
X1: library part x0006, "=Описание", Contact_1=VIN, Contact_2=VIN, Contact_3=GND, HelpURL=https://www.te.com/usa-en/product-1-1123723-3.html, ID=x0006, Наименование=1-1123723-3, Описание="Economy Power 3 pin 3,96 мм вилка прямой", Производитель="TE Connectivity", Фамилия=Ларионов
X2: library part x0007, "=Описание", Contact_1=VOUT, Contact_2=VOUT, Contact_3=GND, Contact_4=GND, HelpURL=https://www.te.com/usa-en/product-1-1123723-4.html, ID=x0007, Наименование=1-1123723-4, Описание="Economy Power 4 pin 3,96 мм вилка прямой", Производитель="TE Connectivity", Фамилия=Ларионов

## Free pads (board coordinates)
  round 5.2 hole 2.2 mask+0.05: 2(4,26.5) 2(56,3.5)

## Via types
v1: diameter 0.6, hole 0.3, Top Layer to Bottom Layer, tented both sides, 632 vias
v2: diameter 0.6, hole 0.3, Top Layer to Bottom Layer, 16 vias

## Nets (pads, with @x,y where several pads share a name; then routed paths per layer and width w, separated by ;. In a path a pad name is that pad's centre, name@x,y a point inside that pad or via, vN(x,y) a via of type N, cw(c..) or ccw(c..) an arc to the next point about the centre after c; other vN are vias at no path point)
0V_IN: VD2.1 VT1.D X1.3
+VIN: C1.2 DD1.1 DD1.2 DD1.3 DD1.6 R1.1 R2.1 X1.1 X1.2 | length 3.4
  Top Layer w0.3: 17.8,18.55 18.012,18.339 18.012,16.488 18.168,16.331 18.607,16.331 18.626,16.312 DD1.6
BST: C5.1 DD2.7 | length 2.1
  Top Layer w0.3: DD2.7 40.008,19.469 41.82,19.469 C5.1
dVdT: C4.2 DD1.10 | length 1.8
  Top Layer w0.3: C4.2 19.148,12.024 DD1.10
FB: DD2.5 R8.2 R9.1 | length 3.5
  Top Layer w0.3: R9.1@39.791,15.098 39.827,15.062 R8.2@41.63,15.062 ; R9.1@39.918,15.352 DD2.5
GND: C1.1 C2.1 C3.1 C4.1 C6.1 DD1.0 DD1.9 DD1.12 DD2.0 DD2.1 HL1.1 R4.1 R5.2 R6.2 R9.2 VT1.S X2.3 X2.4 | length 0
  Top Layer w0.3: R6.2 R6.2@26.511,12.032
  other v1: 1.6,1.6 2.8,1.6 4,1.6 5.2,1.6 6.4,1.6 7.6,1.6 8.8,1.6 10,1.6 11.2,1.6 12.4,1.6 13.6,1.6 14.8,1.6 16,1.6 17.2,1.6 18.4,1.6 19.6,1.6 20.8,1.6 22,1.6 23.2,1.6 24.4,1.6 25.6,1.6 26.8,1.6 28,1.6 29.2,1.6 30.4,1.6 31.6,1.6 32.8,1.6 34,1.6 35.2,1.6 36.4,1.6 37.6,1.6 38.8,1.6 40,1.6 41.2,1.6 42.4,1.6 43.6,1.6 44.8,1.6 46,1.6 47.2,1.6 48.4,1.6 49.6,1.6 50.8,1.6 52,1.6 53.2,1.6 2.2,2.8 3.4,2.8 4.6,2.8 5.8,2.8 7,2.8 8.2,2.8 9.4,2.8 17.8,2.8 19,2.8 20.2,2.8 21.4,2.8 22.6,2.8 23.8,2.8 25,2.8 26.2,2.8 27.4,2.8 28.6,2.8 29.8,2.8 31,2.8 32.2,2.8 33.4,2.8 34.6,2.8 35.8,2.8 37,2.8 38.2,2.8 39.4,2.8 40.6,2.8 41.8,2.8 43,2.8 44.2,2.8 45.4,2.8 46.6,2.8 47.8,2.8 49,2.8 50.2,2.8 51.4,2.8 52.6,2.8 1.6,4 2.8,4 4,4 5.2,4 6.4,4 7.6,4 22,4 23.2,4 24.4,4 25.6,4 26.8,4 28,4 29.2,4 30.4,4 31.6,4 32.8,4 34,4 35.2,4 36.4,4 37.6,4 38.8,4 40,4 41.2,4 42.4,4 43.6,4 44.8,4 46,4 47.2,4 48.4,4 49.6,4 50.8,4 52,4 2.2,5.2 3.4,5.2 4.6,5.2 5.8,5.2 7,5.2 21.4,5.2 22.6,5.2 23.8,5.2 25,5.2 26.2,5.2 27.4,5.2 28.6,5.2 29.8,5.2 31,5.2 32.2,5.2 33.4,5.2 34.6,5.2 35.8,5.2 37,5.2 38.2,5.2 39.4,5.2 40.6,5.2 41.8,5.2 43,5.2 44.2,5.2 45.4,5.2 46.6,5.2 47.8,5.2 49,5.2 50.2,5.2 51.4,5.2 52.6,5.2 1.6,6.4 2.8,6.4 4,6.4 5.2,6.4 22,6.4 23.2,6.4 24.4,6.4 25.6,6.4 26.8,6.4 28,6.4 29.2,6.4 30.4,6.4 31.6,6.4 32.8,6.4 34,6.4 35.2,6.4 36.4,6.4 37.6,6.4 38.8,6.4 40,6.4 41.2,6.4 42.4,6.4 43.6,6.4 44.8,6.4 46,6.4 47.2,6.4 48.4,6.4 49.6,6.4 50.8,6.4 52,6.4 53.2,6.4 54.4,6.4 59.2,6.4 2.2,7.6 3.4,7.6 4.6,7.6 21.4,7.6 22.6,7.6 23.8,7.6 25,7.6 26.2,7.6 27.4,7.6 28.6,7.6 29.8,7.6 31,7.6 32.2,7.6 33.4,7.6 34.6,7.6 35.8,7.6 37,7.6 38.2,7.6 39.4,7.6 40.6,7.6 45.4,7.6 46.6,7.6 47.8,7.6 56.2,7.6 57.4,7.6 58.6,7.6 17.2,8.6 1.6,8.8 2.8,8.8 8.8,8.8 10,8.8 20.8,8.8 22,8.8 23.2,8.8 24.4,8.8 25.6,8.8 26.8,8.8 28,8.8 29.2,8.8 30.4,8.8 31.6,8.8 32.8,8.8 34,8.8 35.2,8.8 36.4,8.8 37.6,8.8 38.8,8.8 40,8.8 44.8,8.8 46,8.8 47.2,8.8 56.8,8.8 58,8.8 59.2,8.8 16.4,9.3 17.2,9.3 2.2,10 9.4,10 16.4,10 17.2,10 21.4,10 22.6,10 23.8,10 25,10 26.2,10 27.4,10 28.6,10 29.8,10 31,10 32.2,10 33.4,10 34.6,10 35.8,10 37,10 38.2,10 39.4,10 40.6,10 45.4,10 46.6,10 56.2,10 57.4,10 58.6,10 12.7,10.5 13.4,10.5 14.1,10.5 14.8,10.5 15.5,10.5 1.6,11.2 8.8,11.2 12.4,11.2 22,11.2 23.2,11.2 28,11.2 29.2,11.2 30.4,11.2 31.6,11.2 32.8,11.2 34,11.2 35.2,11.2 37.6,11.2 38.8,11.2 56.8,11.2 58,11.2 59.2,11.2 2.2,12.4 9.4,12.4 15.4,12.4 16.6,12.4 17.8,12.4 22.6,12.4 23.8,12.4 28.6,12.4 29.8,12.4 31,12.4 32.2,12.4 33.4,12.4 34.6,12.4 38.2,12.4 56.2,12.4 57.4,12.4 58.6,12.4 1.6,13.6 8.8,13.6 10,13.6 12.4,13.6 13.6,13.6 14.8,13.6 16,13.6 17.2,13.6 20.8,13.6 22,13.6 23.2,13.6 26.8,13.6 28,13.6 29.2,13.6 30.4,13.6 31.6,13.6 32.8,13.6 34,13.6 35.2,13.6 37.6,13.6 38.8,13.6 56.8,13.6 58,13.6 59.2,13.6 2.2,14.8 9.4,14.8 11.8,14.8 13,14.8 27.4,14.8 28.6,14.8 29.8,14.8 31,14.8 32.2,14.8 37,14.8 45.4,14.8 46.6,14.8 56.2,14.8 57.4,14.8 58.6,14.8 1.6,16 8.8,16 10,16 12.4,16 13.6,16 29.2,16 36.4,16 37.6,16 44.8,16 46,16 49.6,16 50.8,16 55.6,16 56.8,16 58,16 59.2,16 2.2,17.2 9.4,17.2 27.4,17.2 28.6,17.2 29.8,17.2 31,17.2 32.2,17.2 38.2,17.2 45.4,17.2 46.6,17.2 50.2,17.2 55,17.2 56.2,17.2 57.4,17.2 58.6,17.2 1.6,18.4 35.2,18.4 41.2,18.4 42.4,18.4 43.6,18.4 44.8,18.4 46,18.4 49.6,18.4 50.8,18.4 55.6,18.4 56.8,18.4 58,18.4 59.2,18.4 2.2,19.6 21.4,19.6 22.6,19.6 43,19.6 44.2,19.6 45.4,19.6 46.6,19.6 50.2,19.6 51.4,19.6 52.6,19.6 53.8,19.6 55,19.6 56.2,19.6 57.4,19.6 58.6,19.6 1.6,20.8 2.8,20.8 5.2,20.8 6.4,20.8 20.8,20.8 22,20.8 23.2,20.8 24.4,20.8 25.6,20.8 26.8,20.8 28,20.8 29.2,20.8 30.4,20.8 31.6,20.8 35.2,20.8 36.4,20.8 37.6,20.8 43.6,20.8 44.8,20.8 46,20.8 49.6,20.8 50.8,20.8 55.6,20.8 56.8,20.8 58,20.8 59.2,20.8 2.2,22 3.4,22 4.6,22 5.8,22 7,22 8.2,22 9.4,22 10.6,22 11.8,22 13,22 17.8,22 19,22 20.2,22 21.4,22 22.6,22 23.8,22 25,22 26.2,22 27.4,22 28.6,22 29.8,22 31,22 32.2,22 33.4,22 34.6,22 35.8,22 37,22 44.2,22 50.2,22 55,22 56.2,22 57.4,22 58.6,22 1.6,23.2 2.8,23.2 4,23.2 5.2,23.2 6.4,23.2 7.6,23.2 8.8,23.2 10,23.2 11.2,23.2 12.4,23.2 13.6,23.2 17.2,23.2 18.4,23.2 19.6,23.2 20.8,23.2 22,23.2 23.2,23.2 24.4,23.2 25.6,23.2 26.8,23.2 28,23.2 29.2,23.2 30.4,23.2 31.6,23.2 32.8,23.2 34,23.2 35.2,23.2 36.4,23.2 37.6,23.2 43.6,23.2 49.6,23.2 50.8,23.2 52,23.2 54.4,23.2 55.6,23.2 56.8,23.2 58,23.2 59.2,23.2 7,24.4 8.2,24.4 9.4,24.4 10.6,24.4 11.8,24.4 13,24.4 14.2,24.4 15.4,24.4 16.6,24.4 17.8,24.4 19,24.4 20.2,24.4 21.4,24.4 22.6,24.4 23.8,24.4 25,24.4 26.2,24.4 27.4,24.4 28.6,24.4 29.8,24.4 31,24.4 32.2,24.4 33.4,24.4 34.6,24.4 35.8,24.4 37,24.4 50.2,24.4 51.4,24.4 52.6,24.4 53.8,24.4 55,24.4 56.2,24.4 57.4,24.4 58.6,24.4 7.6,25.6 8.8,25.6 10,25.6 11.2,25.6 12.4,25.6 13.6,25.6 14.8,25.6 16,25.6 17.2,25.6 18.4,25.6 19.6,25.6 20.8,25.6 22,25.6 23.2,25.6 24.4,25.6 25.6,25.6 26.8,25.6 28,25.6 29.2,25.6 30.4,25.6 31.6,25.6 32.8,25.6 34,25.6 35.2,25.6 36.4,25.6 37.6,25.6 49.6,25.6 50.8,25.6 52,25.6 53.2,25.6 54.4,25.6 55.6,25.6 56.8,25.6 58,25.6 59.2,25.6 8.2,26.8 9.4,26.8 10.6,26.8 11.8,26.8 13,26.8 14.2,26.8 15.4,26.8 16.6,26.8 17.8,26.8 19,26.8 20.2,26.8 21.4,26.8 22.6,26.8 23.8,26.8 25,26.8 26.2,26.8 27.4,26.8 28.6,26.8 29.8,26.8 31,26.8 32.2,26.8 33.4,26.8 34.6,26.8 35.8,26.8 37,26.8 50.2,26.8 51.4,26.8 52.6,26.8 53.8,26.8 55,26.8 56.2,26.8 57.4,26.8 58.6,26.8 7.6,28 8.8,28 10,28 11.2,28 12.4,28 13.6,28 14.8,28 16,28 17.2,28 18.4,28 19.6,28 20.8,28 22,28 23.2,28 24.4,28 25.6,28 26.8,28 28,28 29.2,28 30.4,28 31.6,28 32.8,28 34,28 35.2,28 36.4,28 37.6,28 43.6,28 49.6,28 50.8,28 52,28 53.2,28 54.4,28 55.6,28 56.8,28 58,28 59.2,28
  other v2: 21.5,15.2 22.5,15.2 21,16.1 22,16.1 23,16.1 21.5,16.9 22.5,16.9 36.9,17.7 21,17.8 22,17.8 23,17.8 36.4,18.5 37.4,18.5 36.887,19.271 36.4,20 37.4,20
ILIM: DD1.11 R6.1 | length 1.8
  Top Layer w0.3: R6.1@24.961,11.982 R6.1 25.048,12.094 DD1.11 DD1.11@25.067,13.693
NetC6_2: C6.2 R10.2 | length 2.4
  Top Layer w0.3: C6.2 39.934,12.59 41.61,12.59 41.885,12.865 R10.2
NetDD1_7: DD1.7 R2.2 R3.1 | length 7.2
  Top Layer w0.3: R2.2 13.145,17.958 15.697,17.958 15.9,17.755 15.9,17.743 16.866,16.777 R3.1 16.916,16.777 18.012,15.681 19.129,15.681 DD1.7
NetDD1_8: DD1.8 R3.2 R4.2 | length 4.1
  Top Layer w0.3: R4.2 14.992,15.234 16.885,15.234 R3.2 ; R3.2@16.983,15.031 18.602,15.031 18.621,15.012 DD1.8
NetDD2_4: DD2.4 R5.1 | length 2.1
  Top Layer w0.3: R5.1 33.638,15.502 33.638,16.787 33.869,17.018 DD2.4
NetHL1_2: HL1.2 R11.2 | length 2.5
  Top Layer w0.3: HL1.2 41.897,8.47 41.897,10.909 R11.2
NetR1_2: R1.2 VD1.1 VT1.G | length 8.7
  Top Layer w0.3: R1.2 11.123,17.68 VD1.1 11.43,11.835 VT1.G
NetVD1_2: VD1.2 VD2.2 | length 6.9
  Top Layer w0.3: VD1.2 14.023,12.142 14.523,11.642 15.536,11.642 16.383,10.795 18.415,10.795 19.025,10.185 19.025,9.218 VD2.2@19,9.193
PGOOD: DD2.6 R7.2 | length 2.4
  Top Layer w0.3: DD2.6 40.168,18.288 40.949,17.508 41.622,17.508 41.897,17.233 R7.2
SW: C5.2 DD2.8 L1.1
VIN_PR: C2.2 C3.2 DD1.18 DD1.19 DD1.20 DD2.2 DD2.3 | length 0.5
  Top Layer w0.3: DD1.19 DD1.19@25.061,18.899 ; DD1.20 DD1.20@25.059,19.573 ; 26.309,18.262 26.371,18.325 ; DD2.3@33.668,18.288 DD2.3 DD2.3@33.823,18.193
VOUT: L1.2 R7.1 R8.1 R10.1 R11.1 X2.1 X2.2 | length 11.1
  Top Layer w0.3: R7.1 43.383,17.144 43.383,15.112 43.396,15.1 43.377,15.081 43.377,12.947 R10.1 ; R11.1 43.453,10.953 43.453,12.871 R10.1 ; R10.1@43.52,12.975 R10.1 ; 48.413,12.89 48.514,12.991
  Top Layer w0.5: R10.1@43.52,12.975 47.975,12.975
pads on no net: DD1.4 DD1.5 DD1.13 DD1.14 DD1.15 DD1.16 DD1.17

## Polygon pours and split planes (outlines as drawn)
no net on Bottom 3D Body (solid): 9.017,29.337
GND on Top Layer "Top Layer-GND" (solid, pour order 52): 0,29.972 60.96,29.972 60.96,0 0,0
0V_IN on Top Layer "Top Layer-0V_IN" (solid, pour order 21): 3.175,12.7 3.302,12.827 8.255,12.827 8.255,8.255 12.065,8.255 16.383,8.255 16.383,7.239 20.066,7.239 20.701,6.604 20.701,4.191 17.272,4.191 16.764,3.683 16.383,3.048 15.939,2.35 10.541,2.413 3.175,9.779
+VIN on Top Layer "Top Layer-+VIN" (solid, pour order 15): 17.428,18.542 18.063,17.907 19.939,17.907 19.939,20.32 3.175,20.32 3.175,13.081 8.255,13.081 8.255,18.542
VIN_PR on Top Layer "Top Layer-NetC2_2" (solid, pour order 31): 33.02,17.907 33.274,17.653 35.179,17.653 35.179,19.812 34.862,20.129 32.83,20.129 32.385,19.939 24.257,19.939 24.257,17.907
VOUT on Top Layer "Top Layer-NetL1_2" (solid, pour order 49): 48.641,14.8 48.641,27.559 48.006,28.194 44.577,28.194 43.815,27.431 43.815,24.13 47.117,20.828 47.117,10.477 48.387,9.207 48.387,7.125 55.499,7.125 55.499,14.8
no net on Top Layer "Top Layer-No Net 2" (solid, pour order 41): 51.308,23.368
SW on Top Layer "Top Layer-SW" (solid, pour order 37): 38.481,20.129 38.481,27.368 38.862,27.749 42.672,27.749 43.053,27.368 43.053,20.129
+VIN on Top Layer "Top Layer-+VIN 1" (solid, pour order 29): 35.179,17.259
+VIN on Top Layer "Top Layer-+VIN 2" (solid, pour order 25): 25.908,19.812
no net on Top Layer "Top Layer-No Net" (solid, pour order 9): 3.683,30.48
no net on Top Layer "Top Layer-No Net 1" (solid, pour order 7): 3.683,30.48
GND on Bottom Layer "Bottom Layer-GND 1" (solid, pour order 54): 0,29.972 60.96,29.972 60.96,0 0,0
GND on Bottom Layer "Bottom Layer-GND" (solid, pour order 56): 9.271,28.321

## Silkscreen, mask and mechanical layers (free items; w line width, h text height)
Top Overlay:
  text "PWR" at 41.11,6.147 h1.2
  text ".designation" at 36.892,0.951 h2
  text "Buck  / 48V-5V 1A" at 25.146,0.381 h3
Bottom Overlay:
  text ".pcb_dec_number" at 52.324,0.889 h2
Board:
  the board outline again, w0.1
Assembly Notes (Mech5):
  text "'.title'" at 0,-2.5 h2
  text "'.project'_'.pcb_dec_number'['.Pcb_File_Name_No_Path']" at 0,-5 h2